# Altium PCB shoot.PcbDoc
Units mm, origin at the board's own origin, x right, y up, seen from the top; angles counter-clockwise.
Board outline 40.89 x 48.64 mm, 2 copper layers (Top Layer, Bottom Layer); 32 components, 48 nets, 93 pads, 19 vias.
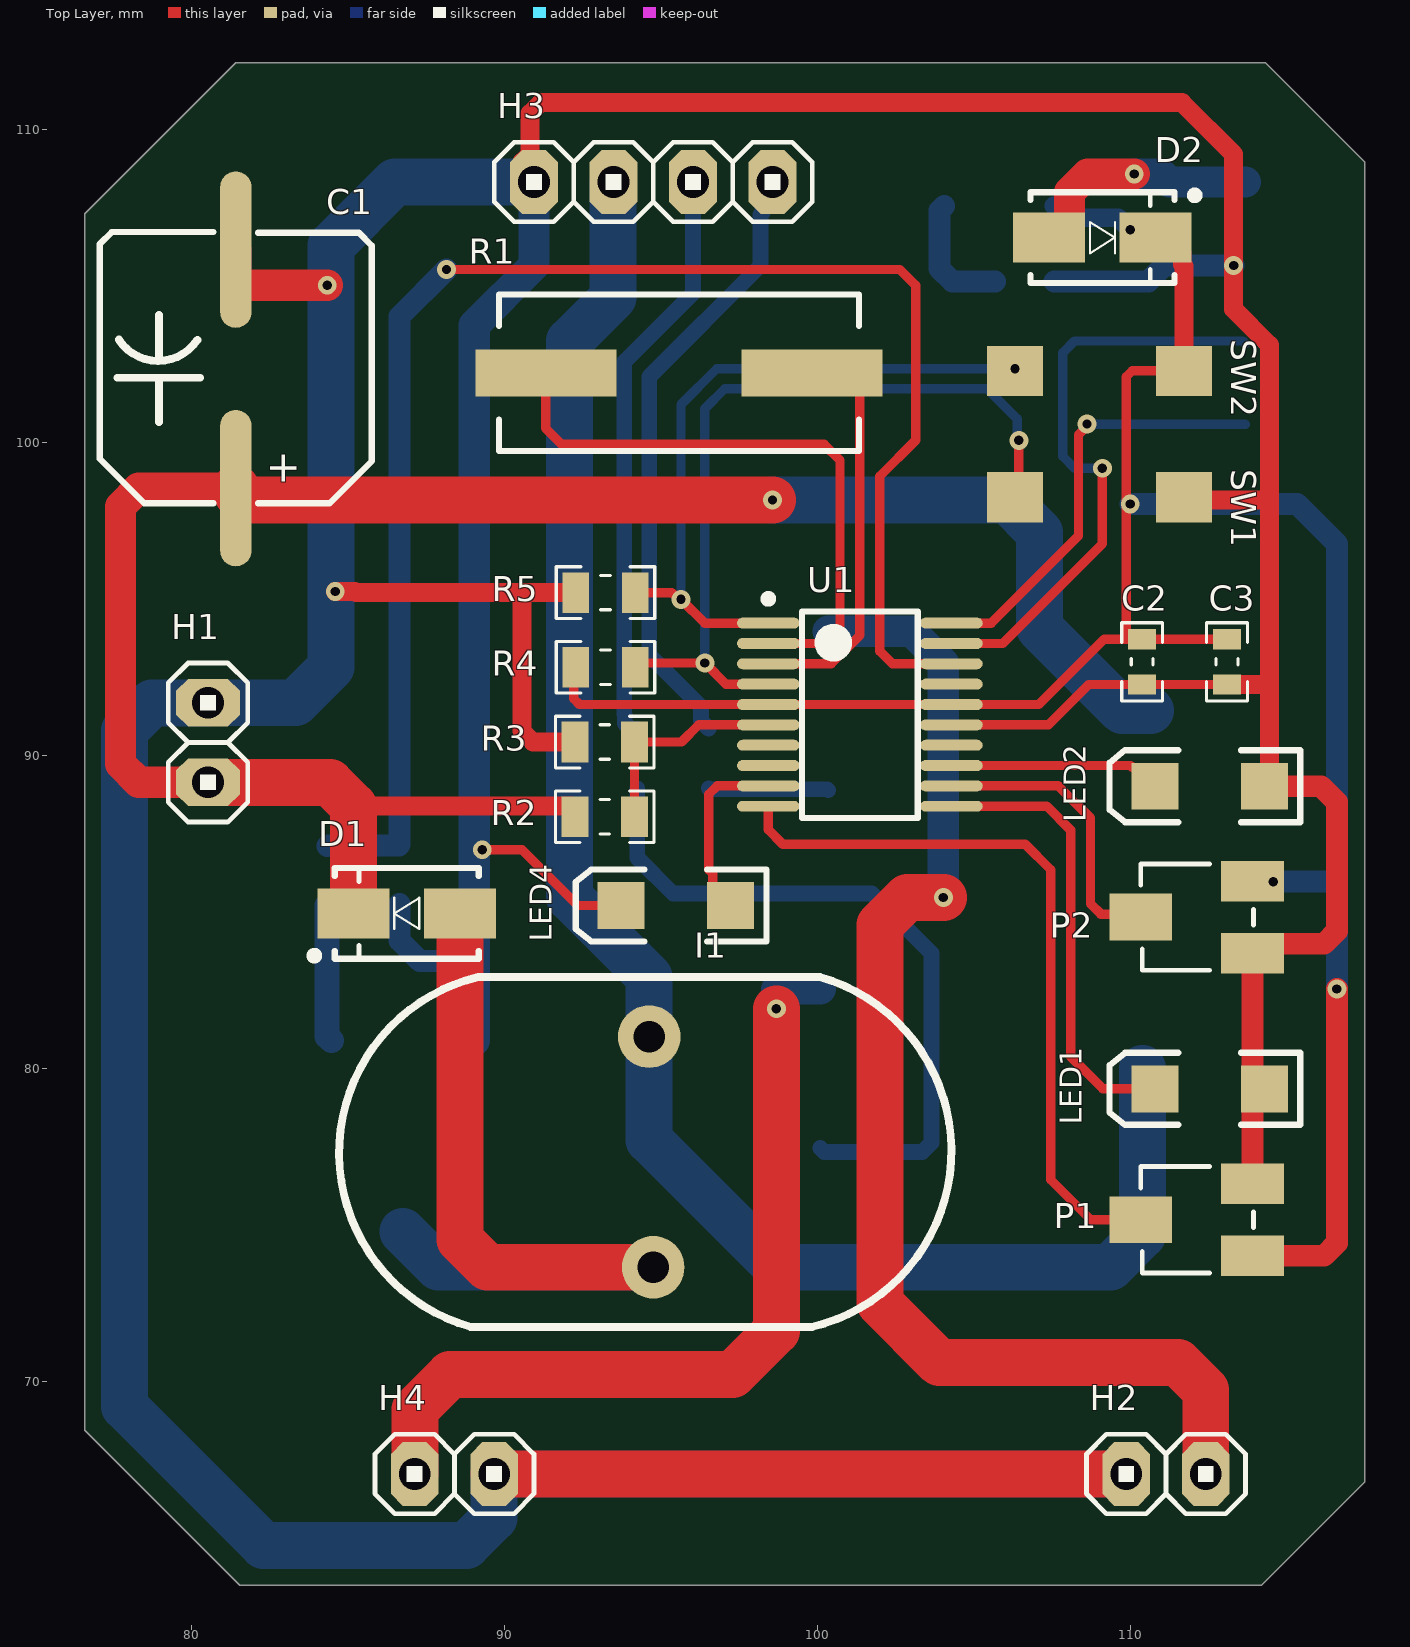
[diagram p0: Top Layer view]
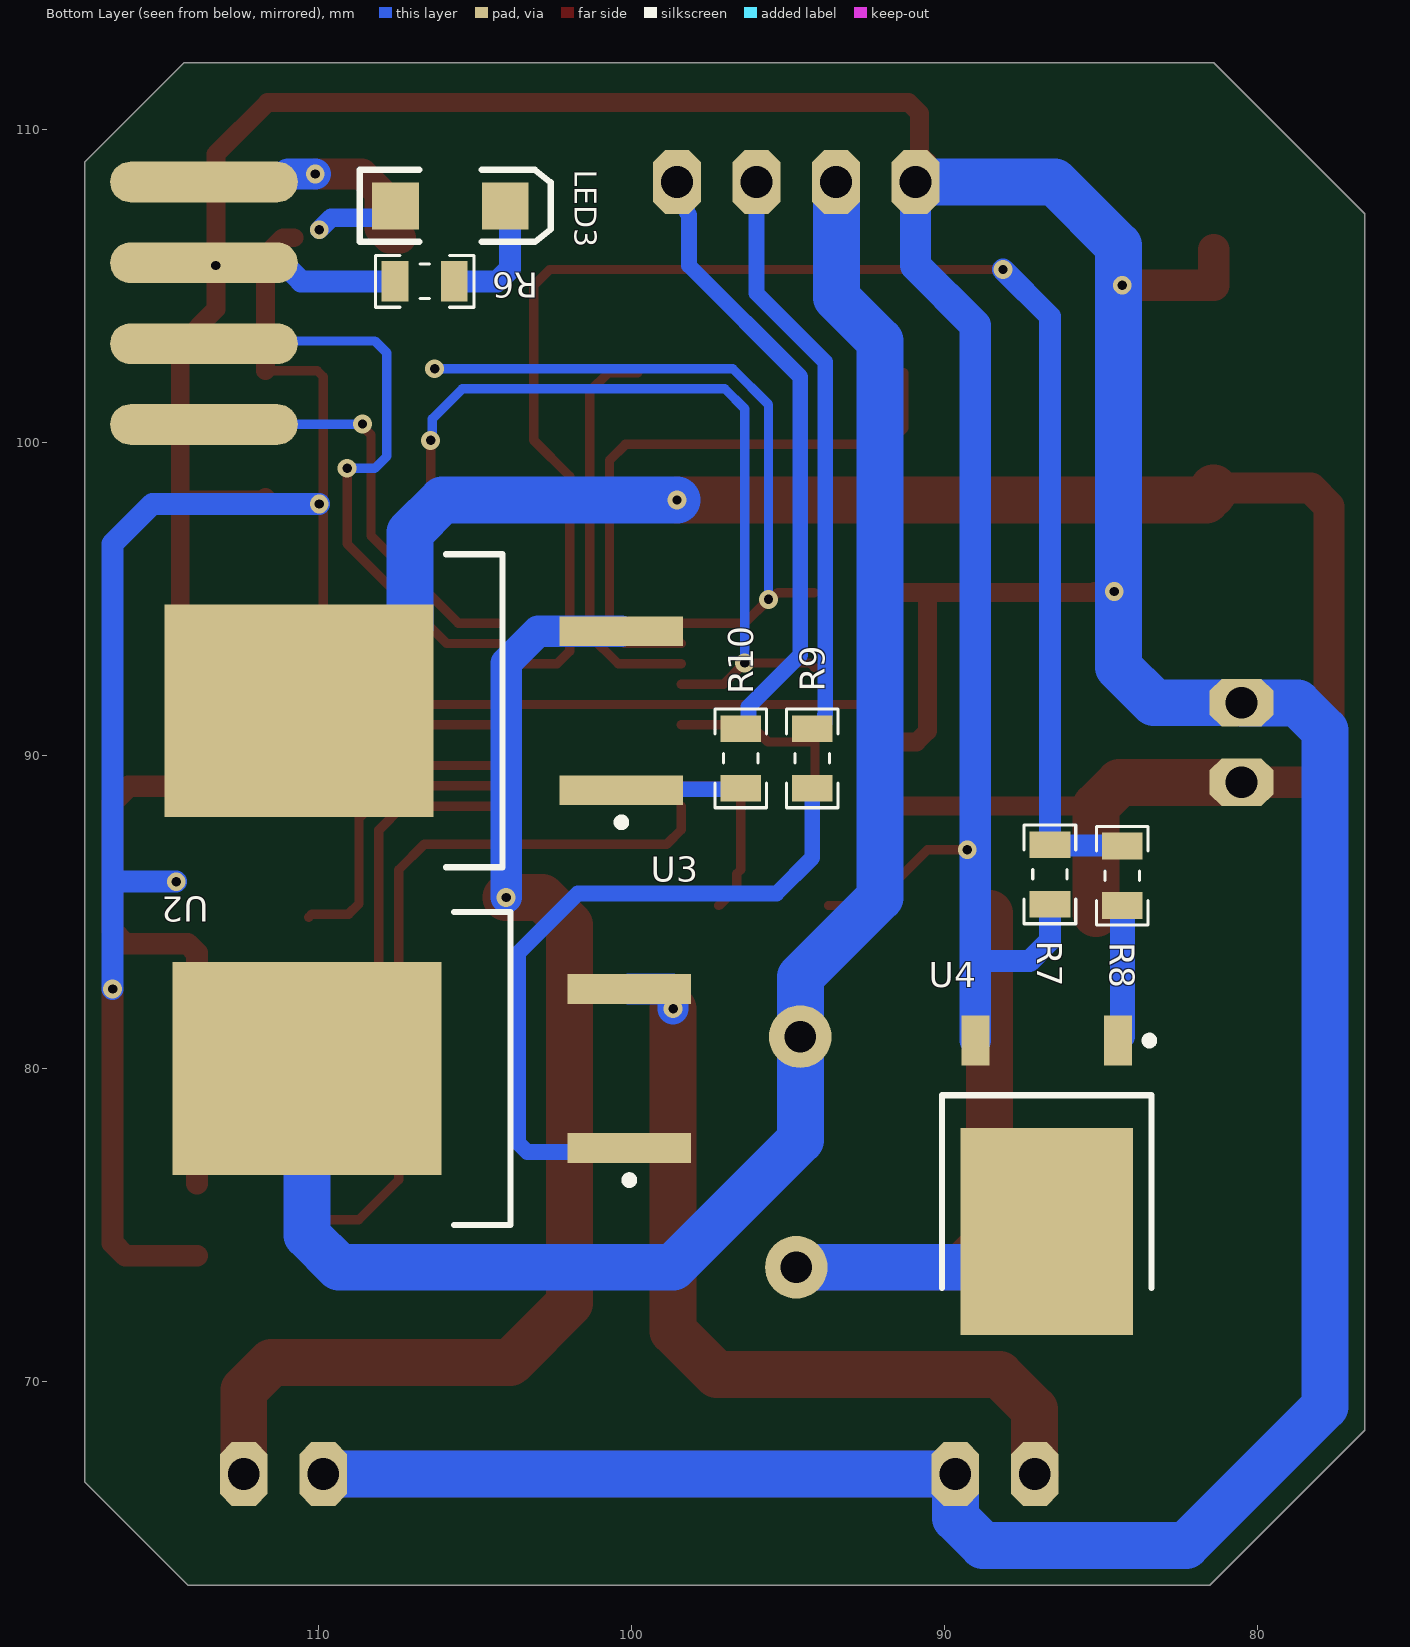
[diagram p1: Bottom Layer view, seen from below]
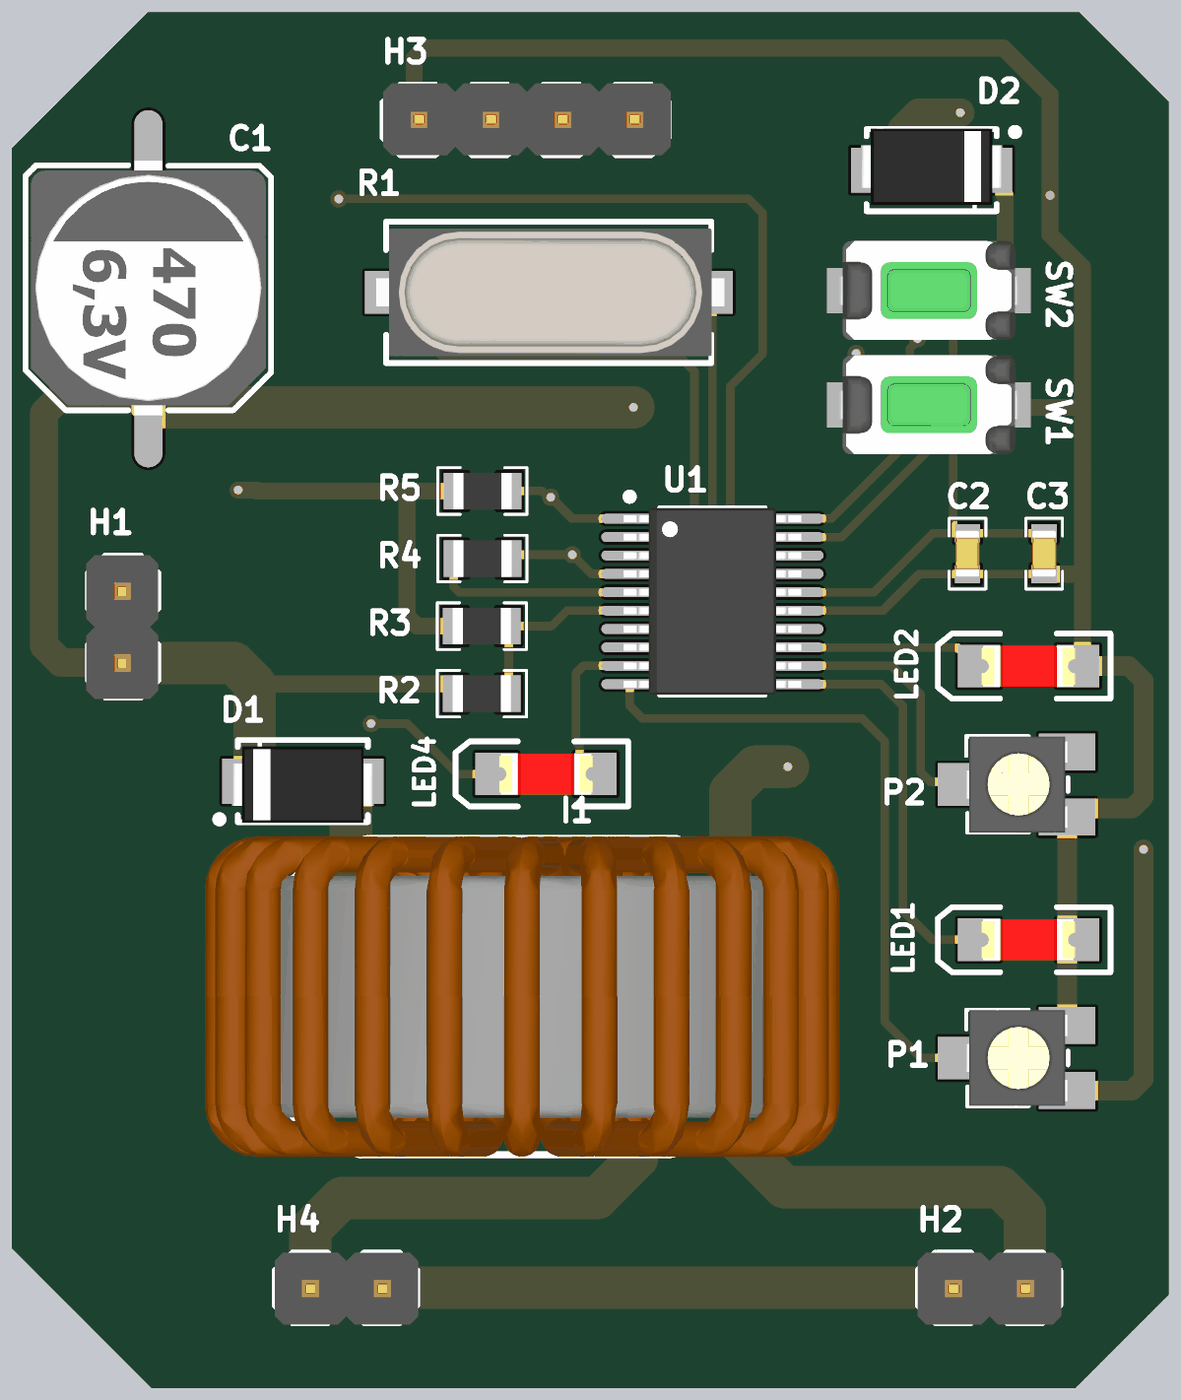
[diagram p2: 3D render of the assembled board from above, using the file's embedded part models]
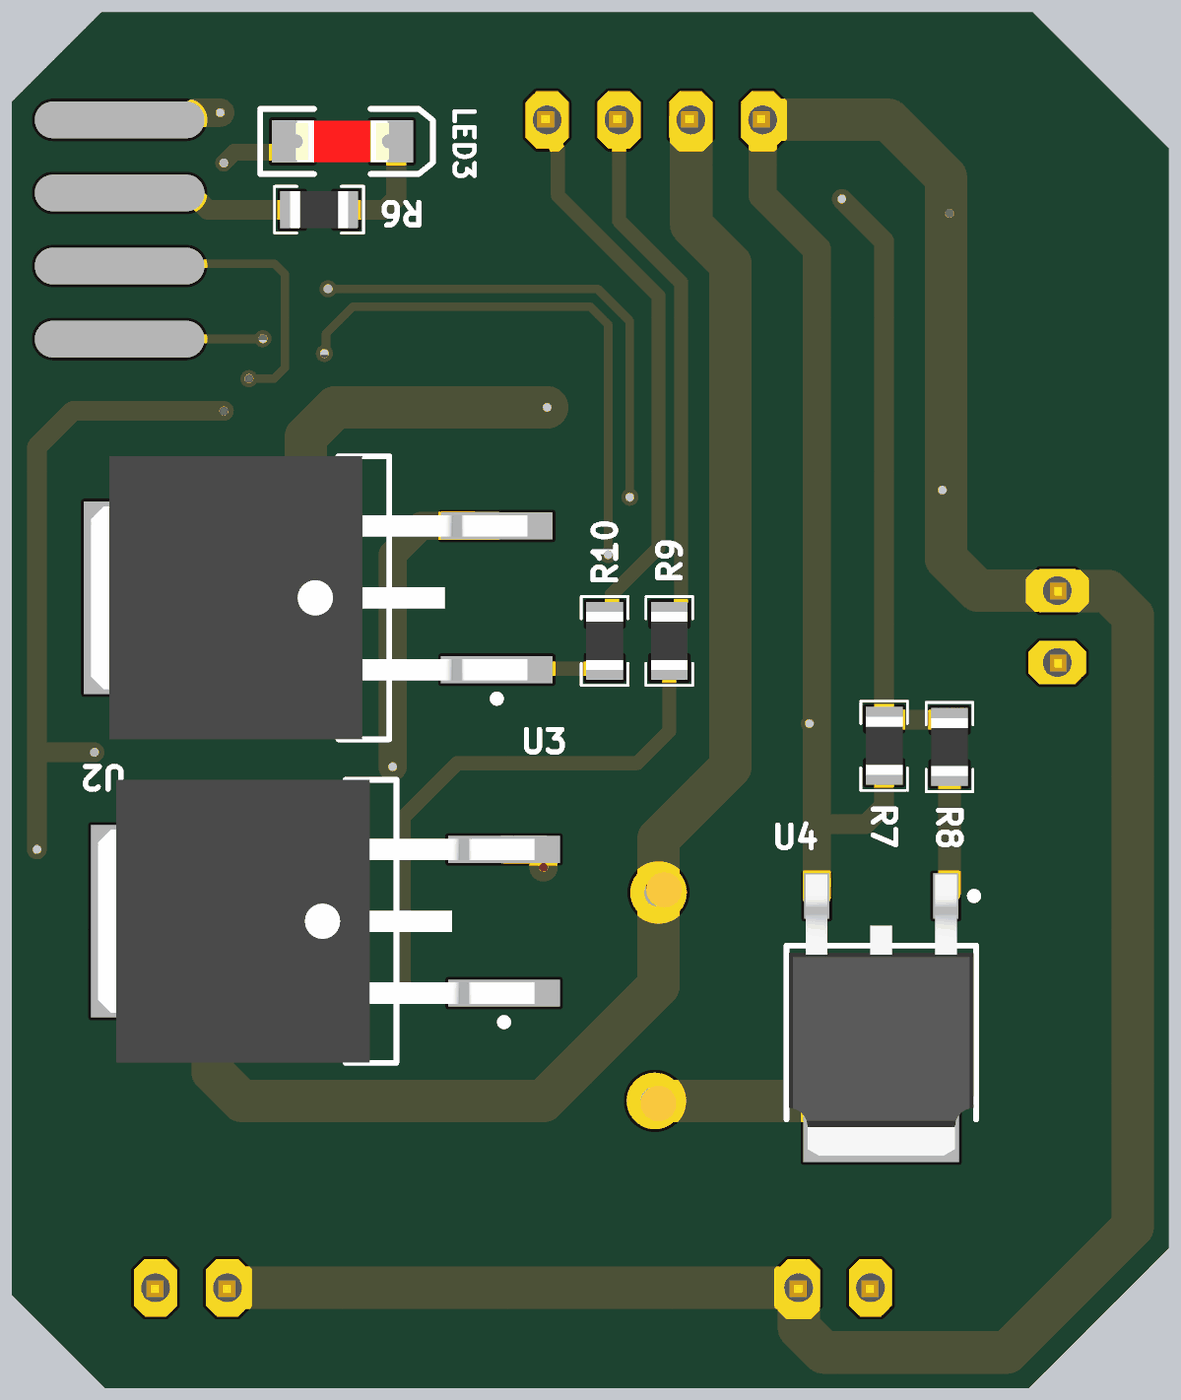
[diagram p3: 3D render of the assembled board from below, using the file's embedded part models]

## Layer stack, top to bottom
Top Solder: solder mask 0.0102, Solder Resist, Dk 3.5
Top Layer: signal copper 0.0356
Dielectric 1: dielectric 0.32, FR-4, Dk 4.8
Bottom Layer: signal copper 0.0356
Bottom Solder: solder mask 0.0102, Solder Resist, Dk 3.5

## Board outline
76.581,68.453 76.581,107.315 81.407,112.141 114.3,112.141 117.475,108.966 117.475,66.802 114.173,63.5 81.534,63.5

## Design rules (kind name [scope] priority, off if disabled: settings)
Clearance [All] p1: gap=0.2 ignorepadtopadclearanceinfootprint=FALSE except(0.3: Arc-Arc Arc-Track Track-Track; 0.4: Arc-Fill Arc-Poly Arc-Region Track-Fill Track-Poly Track-Region SMDPad-Fill SMDPad-Poly SMDPad-Region THPad-Fill THPad-Poly THPad-Region Via-Fill Via-Poly Via-Region Fill-Fill Fill-Poly Fill-Region Poly-Poly Poly-Region Region-Region)
ComponentClearance [All] p1 off: gap=0.254 collisioncheckmode=3 verticalgap=0.254 showdistances=FALSE
Height [All] p1: minheight=0 maxheight=1000 prefheight=12.7
PolygonConnect [All] p1: connectstyle=Relief reliefconductorwidth=0.254 reliefentries=4 polygonreliefangle="90 Angle" airgapwidth=0.254
RoutingVias [All] p1: holewidth=0.3 width=0.6 viastyle="Through Hole" minholewidth=0.1 minwidth=0.1 maxholewidth=10 maxwidth=10
SolderMaskExpansion [All] p1: expansion=0.102 istentingtop=FALSE
Width [All] p1: maxlimit=10 minlimit=0.1 preferedwidth=0.3
28 further rules are at their usual default settings.

## Components (designator, comment, footprint, x,y, rotation, side; value= is the part's Value field where it differs from the comment)
C1 "Comment" "CAP SMD 470uF" 81.407,102.362 r270 top
C2 "Comment" CAP0603 110.363,93.002 r90 top
C3 "Comment" CAP0603 113.074,93.002 r90 top
D1 "Comment" DIOM4629X24N 86.868,84.963 r180 top
D2 "Comment" DIOM4629X24N 109.093,106.553 r0 top
H1 "Comment" My_1X02 80.518,89.154 r270 top
H2 "Comment" My_1X02 112.395,67.056 r0 top
H3 "Comment" My_1X04 94.742,108.331 r0 top
H4 "Comment" My_1X02 89.662,67.056 r0 top
I1 "Comment" "Inductor Iron" 94.615,81.026 r270 top
LED1 "" "LED 1206" 112.517,79.359 r180 top
LED2 "" "LED 1206" 112.517,89.027 r180 top
LED3 "" "LED 1206" 105.791,107.569 r180 bottom
LED4 "" "LED 1206" 95.465,85.216 r180 top
P1 "Comment" "POT4MM-Small Pot" 111.887,75.177 r180 top
P2 "Comment" "POT4MM-Small Pot" 111.887,84.845 r180 top
R1 "R15" "Crystal SMD" 95.563,102.235 r180 top value="12 MHz" (schematic designator Y1)
R2 "Comment" RES0805 93.195,88.053 r0 top
R3 "Comment" RES0805 93.195,90.44 r0 top
R4 "Comment" RES0805 93.218,92.827 r0 top
R5 "Comment" RES0805 93.218,95.213 r0 top
R6 "Comment" RES0805 106.614,105.156 r0 bottom
R7 "Comment" RES0805 86.64,86.211 r90 bottom
R8 "Comment" RES0805 84.328,86.167 r90 bottom
R9 "Comment" RES0805 94.234,89.916 r270 bottom
R10 "Comment" RES0805 96.52,89.916 r270 bottom
SW1 "Comment" SMD_ALPS_SKQMBBE010 108.998,98.261 r180 top
SW2 "Comment" SMD_ALPS_SKQMBBE010 108.998,102.298 r180 top
U1 "Comment" TSOP65P630X120-20N 101.346,91.313 r0 top
U2 "Comment" DPAK254P1542X440-3N 106.68,91.44 r0 bottom
U3 "Comment" DPAK254P1542X440-3N 106.426,80.01 r0 bottom
U4 "" TO252-3L 86.741,76.603 r270 bottom

## Footprints (in the part's own frame and the unit in brackets; to place one, negate y for a bottom-side part, rotate by r counter-clockwise, add the part's x,y. Pads: shape width x height; smd on the part's side, far side on the other; paste and mask are expansions set on the pad)
CAP0603 [mm] "Chip Capacitor, 2-Leads, Body 1/60x0/80mm, IPC Medium Density DESIGNER:ABBAS BASEREH"
  rect 0.65x0.9 smd: 1(-0.725,0) 2(0.725,0)
  silkscreen extent -1.25,-0.65 1.25,0.65, body extent -0.82,-0.43 0.82,0.43, height 0.4
"CAP SMD 470uF" [mm] "SMD CAP 470uF"
  oval 5x1 smd: 1(3.81,0) 2(-3.81,0)
  silkscreen extent -4.37,-4.34 4.29,4.34, body extent -4.53,-4.15 4.47,4.15, height 12
"Crystal SMD" [mm] "DESIGNER ABBAS BASEREH"
  rect 4.5x1.5 smd: 1(-4.25,0) 2(4.25,0)
  silkscreen extent -5.75,-2.5 5.75,2.5, body extent -6.21,-2.25 6.09,2.25, height 5.18
DIOM4629X24N [mm] "Molded Diode, 2-Leads, Body 4/60x2/90mm, IPC Medium Density-Design:Abbas Basereh"
  rect 2.3x1.6 smd: 1(-1.7,0) 2(1.7,0)
  silkscreen extent -2.3,-1.45 3.07,1.47, body extent -2.5,-1.22 2.5,1.48, height 2.2
DPAK254P1542X440-3N [mm] "D2-PAK, 3-Pads, Body 7.57x8.36mm (max), IPC Medium Density"
  rect 3.95x0.95 smd: 1(-6.35,2.54) 3(-6.35,-2.54)
  rect 8.6x6.8 smd: 2(3.95,0)
  silkscreen extent -6.47,-5 -0.75,5, body extent -7.42,-5 8,5, height 4.43
"Inductor Iron" [mm]
  round 2 hole 1: 1(0,0) 2(7.366,0.127)
  silkscreen extent -1.91,-9.91 9.27,9.65, body extent -1.98,-11.21 9.34,11.21, height 28.03
"LED 1206" [mm]
  rect 1.5x1.5 smd: 1(-1.75,0) 2(1.75,0)
  silkscreen extent -2.9,-1.15 3.2,1.15, body extent -1.65,-0.72 1.65,0.73, height 1.36
My_1X02 [mil]
  oct 60x80 hole 40: 1(-100,0) 2(0,0)
  silkscreen extent -150,-50 50,50, body extent -149,-51 51,49, height 234
My_1X04 [mil]
  oct 60x80 hole 40: 1(-150,0) 2(-50,0) 3(50,0) 4(150,0)
  silkscreen extent -200,-50 200,50, body extent -198,-49 202,51, height 234
"POT4MM-Small Pot" [mm] "Square Trimming Potentiometer"
  rect 2x1.3 smd: CCW(-2,-1.15) CW(-2,1.15)
  rect 2x1.5 smd: W(1.568,0)
  silkscreen extent -2.03,-1.7 1.57,1.7, body extent -2.03,-1.7 1.57,1.7, height 2
RES0805 [mm] "Chip Resistor, 2-Leads, Body 2/00x1/25mm, IPC Medium Density DESIGNER:ABBAS BASEREH"
  rect 0.85x1.3 smd: 1(-0.95,0) 2(0.95,0)
  silkscreen extent -1.58,-0.82 1.58,0.82, body extent -1.02,-0.65 1.02,0.65, height 0.5
SMD_ALPS_SKQMBBE010 [mm] "Vertical 6.0X3.5 mm Compact Type (SurfaceMount) SKQM Series ; Height 5.0 mm ; 50,000 Cycles ; 1.57N Force"
  rect 1.8x1.6 smd mask-1.27: 1(-2.7,0) 2(2.7,0)
  body extent -3.15,-1.75 3.15,1.75, height 5.03
TO252-3L [mm] "D-PAK, 3-Pads, Body 6.2x6.7mm (max), IPC High Density"
  rect 1.6x0.9 smd: 1(-4.3,2.28) 3(-4.3,-2.28)
  rect 6.6x5.5 smd: 4(1.8,0)
  silkscreen extent -4.42,-3.35 3.6,3.4, body extent -5.06,-3.27 4.88,3.27, height 2.39
TSOP65P630X120-20N [mm] "TSOP, 20-Leads, Body 6.50x4.40mm, Pitch 0.65mm, IPC Medium Density"
  oval 2x0.35 smd: 1(-2.925,2.925) 2(-2.925,2.275) 3(-2.925,1.625) 4(-2.925,0.975) 5(-2.925,0.325) 6(-2.925,-0.325) 7(-2.925,-0.975) 8(-2.925,-1.625) 9(-2.925,-2.275) 10(-2.925,-2.925) 11(2.925,-2.925) 12(2.925,-2.275) 13(2.925,-1.625) 14(2.925,-0.975) 15(2.925,-0.325) 16(2.925,0.325) 17(2.925,0.975) 18(2.925,1.625) 19(2.925,2.275) 20(2.925,2.925)
  silkscreen extent -3.05,-3.3 1.85,3.82, body extent -3.15,-3.3 3.15,3.3, height 1.2

## Part data
R1: library part XTAL, "XTAL Crystal", ComponentLink1Description=Datasheet, ComponentLink2Description=Reference, Design Date=2017-1-3, Designer="ABBAS BASEREH", Mounting Technology="Surface Mount\Through-Hole", Status=Unreleased
U2 U3: "BG10NB37LZ / IGBT"
U4: "FDD6690A"

## Free pads (board coordinates)
  oval 6x1.3 smd far side: 4(113.665,100.584) 4(113.665,103.166) 4(113.665,105.749) 4(113.665,108.331)

## Via types
v1: diameter 0.6, hole 0.3, Top Layer to Bottom Layer, tented both sides, 19 vias

## Nets (pads, with @x,y where several pads share a name; then routed paths per layer and width w, separated by ;. In a path a pad name is that pad's centre, name@x,y a point inside that pad or via, vN(x,y) a via of type N, cw(c..) or ccw(c..) an arc to the next point about the centre after c; other vN are vias at no path point)
12v: H3.2 I1.1 U3.2 | length 55.4
  Bottom Layer w1.5: H3.2 93.46,108.319 93.46,104.636 92.075,103.251 92.075,85.471 94.615,82.931 94.615,77.724 98.679,73.66 109.347,73.66 110.376,74.689 U3.2
50V: C1.1 D1.2 H1.2 R2.1 U2.2 | length 65
  Top Layer w0.6: 85.168,88.392 92.12,88.392 92.245,88.267 R2.1
  Top Layer w1: H1.2 78.31,89.154 77.724,89.74 77.724,97.966 78.31,98.552 C1.1
  Top Layer w1.5: H1.2 80.53,89.142 84.418,89.142 85.168,88.392 D1.2 ; C1.1 81.407,98.421 81.657,98.171 v1(98.552,98.171)
  Bottom Layer w1.5: v1(98.552,98.171) 106.045,98.171 107.08,97.136 107.08,94.09 109.73,91.44 U2.2
A: 
ADC0: R2.2 R3.2 U1.6 | length 6.9
  Top Layer w0.3: R2.2 R3.2 95.647,90.44 96.195,90.988 U1.6
ADC1: U1.7
ADC2: U1.8
ADC4: P1.W U1.10 | length 23.6
  Top Layer w0.3: U1.10 98.421,87.634 98.876,87.179 106.623,87.179 107.442,86.36 107.442,76.454 108.719,75.177 P1.W
ADC5: 
ADC6: P2.W U1.12 | length 9.4
  Top Layer w0.3: U1.12 107.685,89.038 108.712,88.011 108.712,85.274 109.045,84.941 110.223,84.941 P2.W
BAT+: 
BOOT0: R5.2 SW2.2 U1.1 | length 22
  Top Layer w0.3: R5.2 95.333,95.213 95.55,94.996 v1(95.631,94.996) 96.389,94.238 U1.1
  Bottom Layer w0.3: v1(95.631,94.996) 95.631,101.219 96.774,102.362 v1(106.299,102.362)
C1: 
C2: 
E1: 
E2: 
E`: 
G1: R10.2 U2.1 | length 3.8
  Bottom Layer w0.5: R10.2 96.553,88.933 100.297,88.933 U2.1
G2: R9.2 U3.1 | length 22.7
  Bottom Layer w0.5: R9.2 94.234,86.741 95.377,85.598 101.727,85.598 103.632,83.693 103.632,77.636 103.339,77.343 100.203,77.343 U3.1
GATE2: R8.1 U4.1 | length 4.4
  Bottom Layer w0.8: R8.1 84.328,81.036 U4.1
GND: C1.2 C2.1 C3.1 H1.1 H2.1 H3.1 H4.2 LED1.1 LED2.1 LED4.2 P1.CCW P2.CW pad.4@113.665,105.749 R3.1 R5.1 R6.2 R7.1 SW1.1 U1.15 U4.3 | length 243
  Top Layer w0.3: v1(89.281,86.995) 90.551,86.995 92.33,85.216 LED4.2 ; U1.15 107.371,90.988 108.66,92.277 C2.1 C3.1
  Top Layer w0.6: v1(84.582,95.25) 85.217,95.25 85.254,95.213 90.551,95.213 ; H3.1@90.551,108.966 90.805,109.22 90.805,110.52 91.156,110.871 111.633,110.871 113.284,109.22 v1(113.284,105.664) 113.284,104.267 114.427,103.124 114.427,97.995 ; R3.1 90.902,90.44 90.551,90.791 90.551,95.213 ; R5.1 90.551,95.213 ; SW1.1 111.788,98.171 114.251,98.171 114.427,97.995 ; C3.1 114.427,92.277 ; LED2.1 114.427,89.187 114.427,92.277 ; 114.427,92.277 114.427,97.995
  Top Layer w0.7: P1.CCW P2.CW 114.187,83.995 116.176,83.995 116.586,84.405 116.586,88.519 116.078,89.027 LED2.1
  Top Layer w1: C1.2 81.407,105.029 v1(84.328,105.029)
  Top Layer w1.5: H4.2 H2.1
  Bottom Layer w0.7: R7.1 86.64,84.091 87.292,83.439 89.021,83.439 ; R6.2 110.56,105.156 111.068,105.664 v1(113.284,105.664)
  Bottom Layer w1: U4.3 89.021,83.439 89.021,103.753 90.932,105.664 H3.1
  Bottom Layer w1.5: H3.1 86.487,108.331 84.455,106.299 84.455,92.837 83.312,91.694 H1.1 80.506,91.682 78.73,91.682 77.851,90.803 77.851,69.215 82.296,64.77 88.771,64.77 89.65,65.649 89.65,67.044 H4.2 H2.1
K: 
LED1: LED2.2 U1.13 | length 6.8
  Top Layer w0.3: U1.13 109.992,89.688 110.053,89.627 110.167,89.627 LED2.2
LED2: LED1.2 U1.11 | length 14.5
  Top Layer w0.3: U1.11 107.319,88.388 108.077,87.63 108.077,80.391 109.109,79.359 LED1.2
LED3: LED3.2 R6.1 | length 4
  Bottom Layer w0.7: LED3.2 103.886,107.414 103.886,105.566 104.296,105.156 R6.1
LED4: LED4.1 U1.9 | length 5.9
  Top Layer w0.3: LED4.1 96.647,85.784 96.647,86.233 96.52,86.36 96.52,88.773 96.785,89.038 U1.9
NET1: D1.1 I1.2 U4.4 | length 25.3
  Top Layer w1.5: D1.1 88.568,74.539 89.447,73.66 I1.2
  Bottom Layer w1.5: U4.4 87.884,73.66 I1.2@94.607,73.66
NET2: 
NET3: 
NRST: R4.2 SW1.2 U1.4 | length 25.9
  Top Layer w0.3: R4.2 94.305,92.964 v1(96.393,92.964) 97.069,92.288 U1.4 ; SW1.2 106.426,98.389 v1(106.426,100.076)
  Bottom Layer w0.3: v1(96.393,92.964) 96.393,101.092 97.028,101.727 105.41,101.727 106.369,100.768 106.369,100.133 v1(106.426,100.076)
OSC_IN: R1.2 U1.2 | length 19.5
  Top Layer w0.3: R1.2 91.313,101.035 91.31,101.032 91.31,100.46 91.821,99.949 100.203,99.949 100.711,99.441 100.711,94.067 100.232,93.588 U1.2
OSC_OUT: R1.1 U1.3 | length 12.9
  Top Layer w0.3: U1.3 100.431,92.938 101.346,93.853 101.346,101.635 100.746,102.235 R1.1
PWM: 
PWM2: 
PWM_B: 
PWM_G: U1.14
PWM_R: U1.17
SHOOT: H3.4 R10.1 | length 19.9
  Bottom Layer w0.5: R10.1 96.268,91.118 96.268,91.565 94.615,93.218 94.615,102.108 98.171,105.664 98.171,107.289 98.233,107.351 98.233,108.012 H3.4
SHOOTOUT: H2.2 U2.3 | length 40.3
  Top Layer w1.5: v1(104.013,85.471) 102.86,85.471 101.981,84.592 101.981,72.517 103.886,70.612 111.516,70.612 112.395,69.733 H2.2
  Bottom Layer w1: U2.3 102.997,93.98 104.013,92.964 v1(104.013,85.471)
SPIN: H3.3 R9.1 | length 18.7
  Bottom Layer w0.5: R9.1 94.009,90.866 93.834,91.041 93.834,91.315 93.815,91.334 93.815,102.578 96.012,104.775 H3.3
SPINOUT: H4.1 U3.3 | length 27
  Top Layer w1.5: H4.1 87.134,67.068 87.134,69.11 88.255,70.231 97.282,70.231 98.679,71.628 v1(98.679,81.915)
  Bottom Layer w1: v1(98.679,81.915) 98.679,82.525 98.704,82.55 U3.3
SWCLK: pad.4@113.665,100.584 U1.20 | length 14
  Top Layer w0.3: U1.20 105.541,94.238 108.331,97.028 108.331,100.258 108.6,100.527 v1(108.6,100.599)
  Bottom Layer w0.3: v1(108.6,100.599) 108.608,100.592 113.657,100.592 pad.4@113.665,100.584
SWDIO: pad.4@113.665,103.166 U1.19 | length 19.3
  Top Layer w0.3: U1.19 105.907,93.588 109.093,96.774 v1(109.093,99.187)
  Bottom Layer w0.3: v1(109.093,99.187) 108.204,99.187 107.823,99.568 107.823,102.87 108.204,103.251 113.58,103.251 pad.4@113.665,103.166
TIM1_CH3: R7.2 R8.2 U1.18 | length 51.1
  Top Layer w0.3: v1(88.138,105.537) 102.616,105.537 103.124,105.029 103.124,100.076 101.981,98.933 101.981,93.345 102.388,92.938 U1.18
  Bottom Layer w0.7: R8.2 84.35,87.139 86.618,87.139 R7.2 86.64,104.039 v1(88.138,105.537)
VCC: C2.2 C3.2 D2.2 LED3.1 P1.CW P2.CCW R4.1 SW2.1 U1.5 U1.16 | length 75
  Top Layer w0.3: R4.1@92.268,92.7 92.202,92.634 92.202,91.821 92.385,91.638 U1.5 U1.16 107.06,91.638 109.149,93.727 109.855,93.727 ; SW2.1 110.045,102.298 109.855,102.108 109.855,93.727 ; C3.2 C2.2 109.855,93.727
  Top Layer w0.6: D2.2 111.143,106.553 111.643,106.053 111.643,105.703 111.698,105.648 SW2.1
  Top Layer w0.7: P1.CW 116.176,74.027 116.586,74.437 v1(116.586,82.55)
  Bottom Layer w0.6: LED3.1 107.922,107.188 109.601,107.188 v1(109.982,106.807)
  Bottom Layer w0.7: v1(109.982,98.044) 115.316,98.044 116.586,96.774 116.586,85.979 ; v1(114.554,85.979) 116.586,85.979 ; v1(116.586,82.55) 116.586,85.979
VIB2: 
Vin: D2.1 pad.4@113.665,108.331 | length 7.9
  Top Layer w1: D2.1 107.743,106.553 108.043,106.853 108.043,107.999 108.629,108.585 v1(110.109,108.585)
  Bottom Layer w1: v1(110.109,108.585) 110.98,108.585 111.234,108.331 pad.4@113.665,108.331
VO: 
WD_2: 

## Silkscreen, mask and mechanical layers (free items; w line width, h text height)
Mechanical 1:
  the board outline again, w0.3

## Text inside footprints (layer, text, board x,y; h text height)
C1: Top Overlay "+" at 82.507,99.762 h1 r270